# Altium PCB MCU052A_PCB.PcbDoc (part 1 of 2)
Units mil, origin at the board's own origin, x right, y up, seen from the top; angles counter-clockwise.
Board outline 2300 x 1400 mil, 4 copper layers (Top Layer, VCC Layer, GND Layer, Bottom Layer), stack 62.4 mil thick; 49 components, 52 nets, 135 pads, 118 vias.
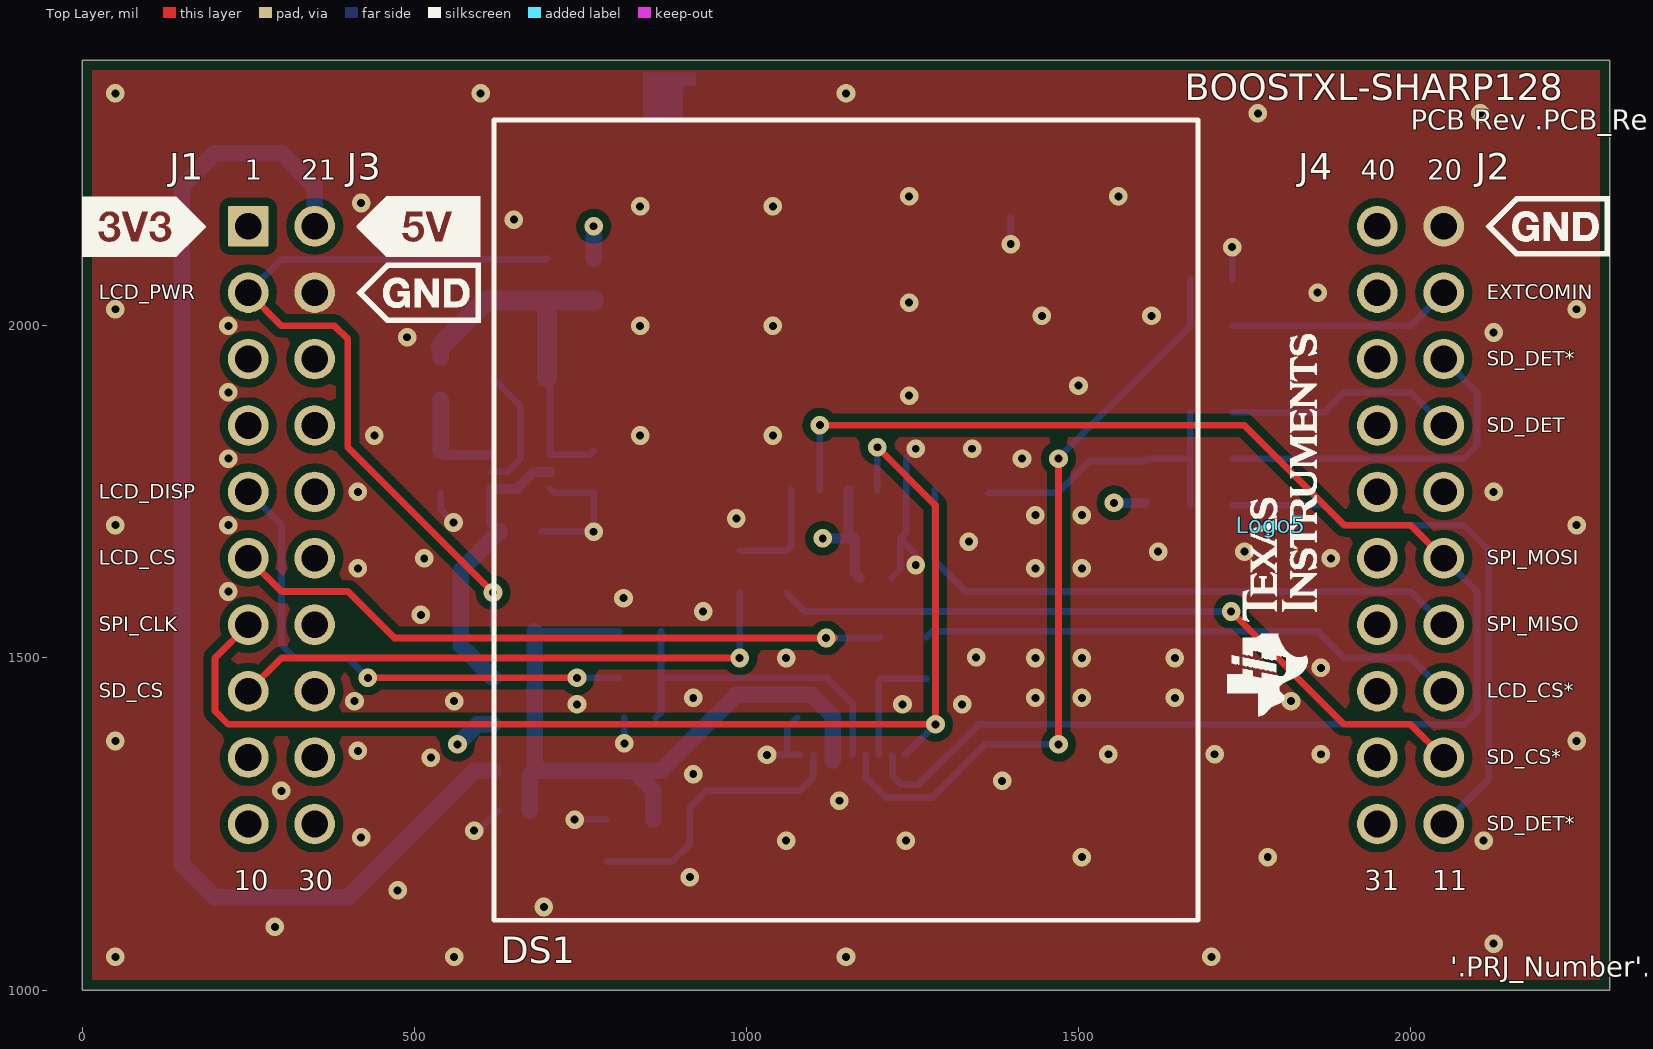
[diagram p0: Top Layer view]
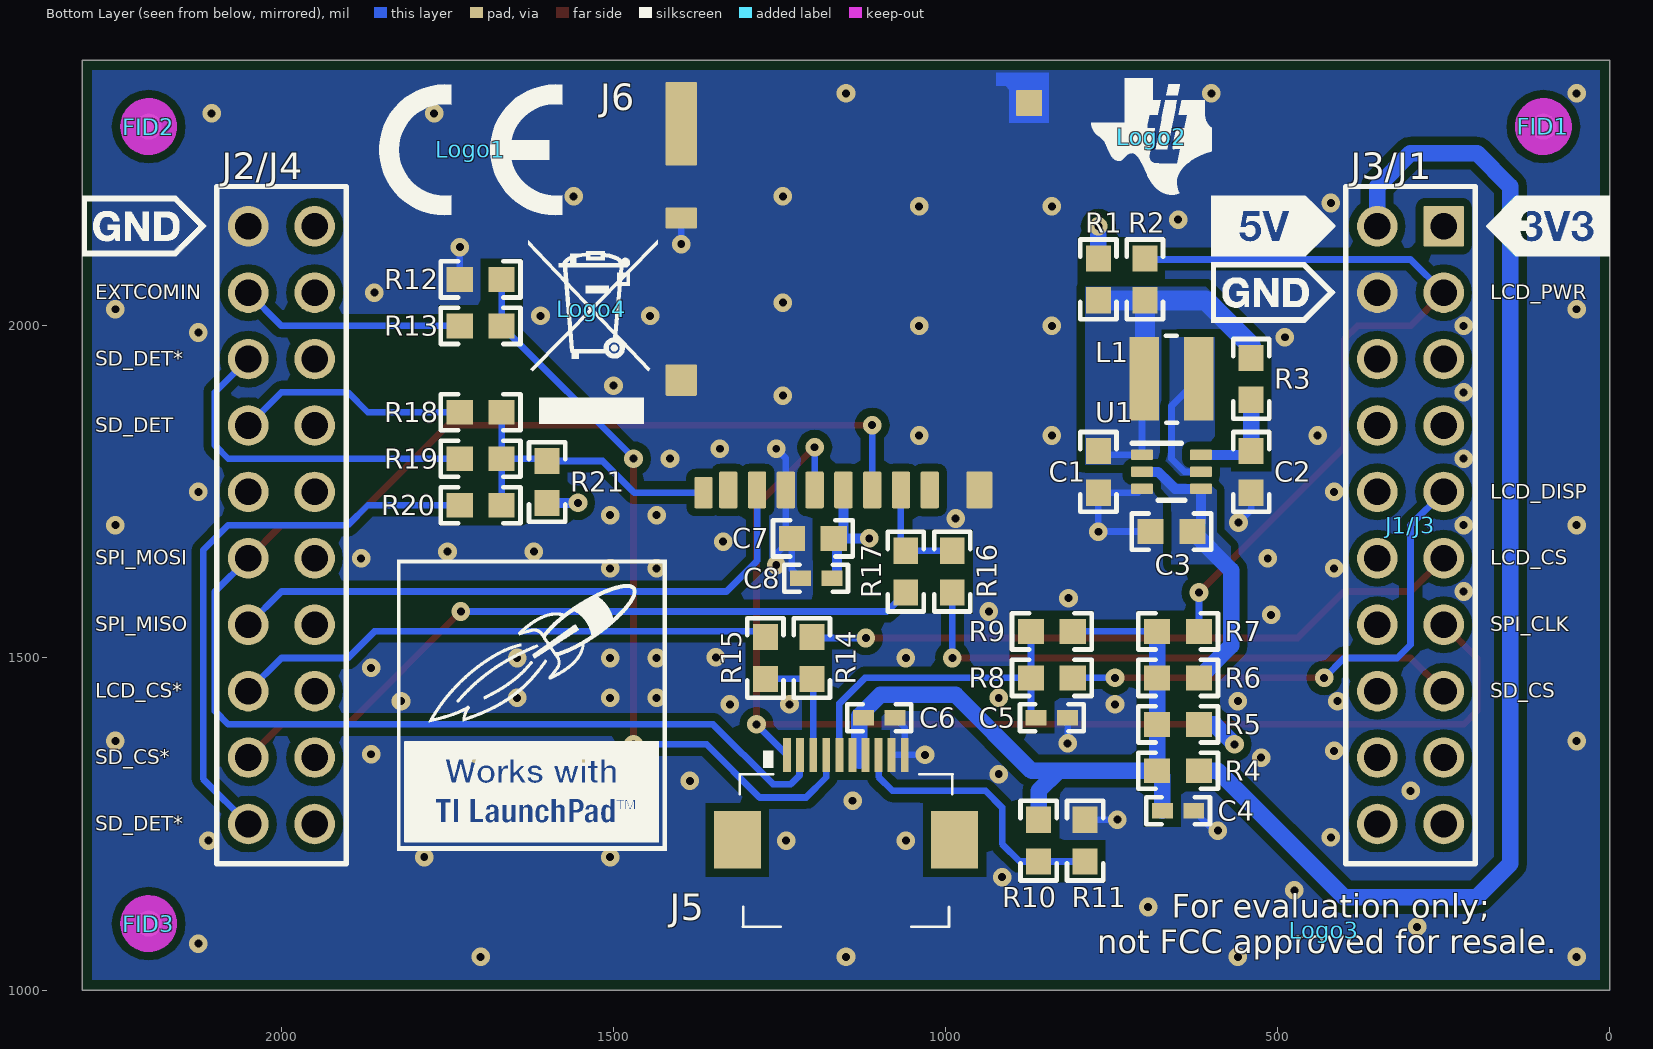
[diagram p1: Bottom Layer view, seen from below]
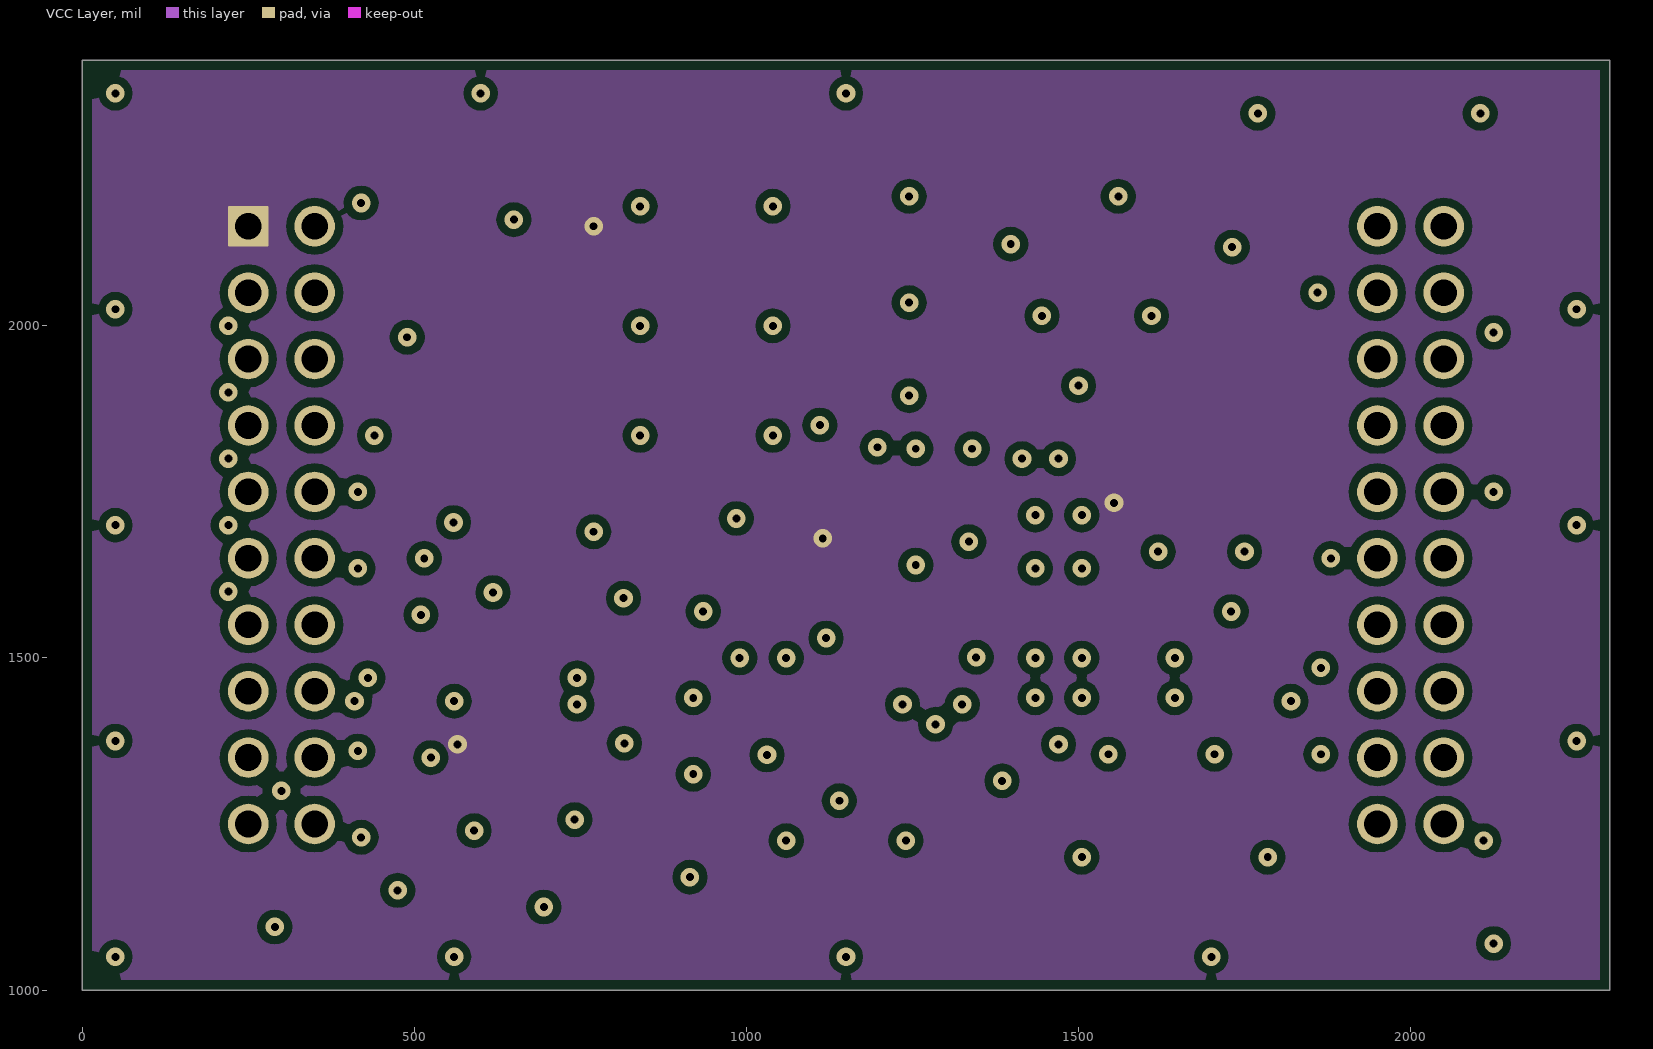
[diagram p2: VCC Layer]
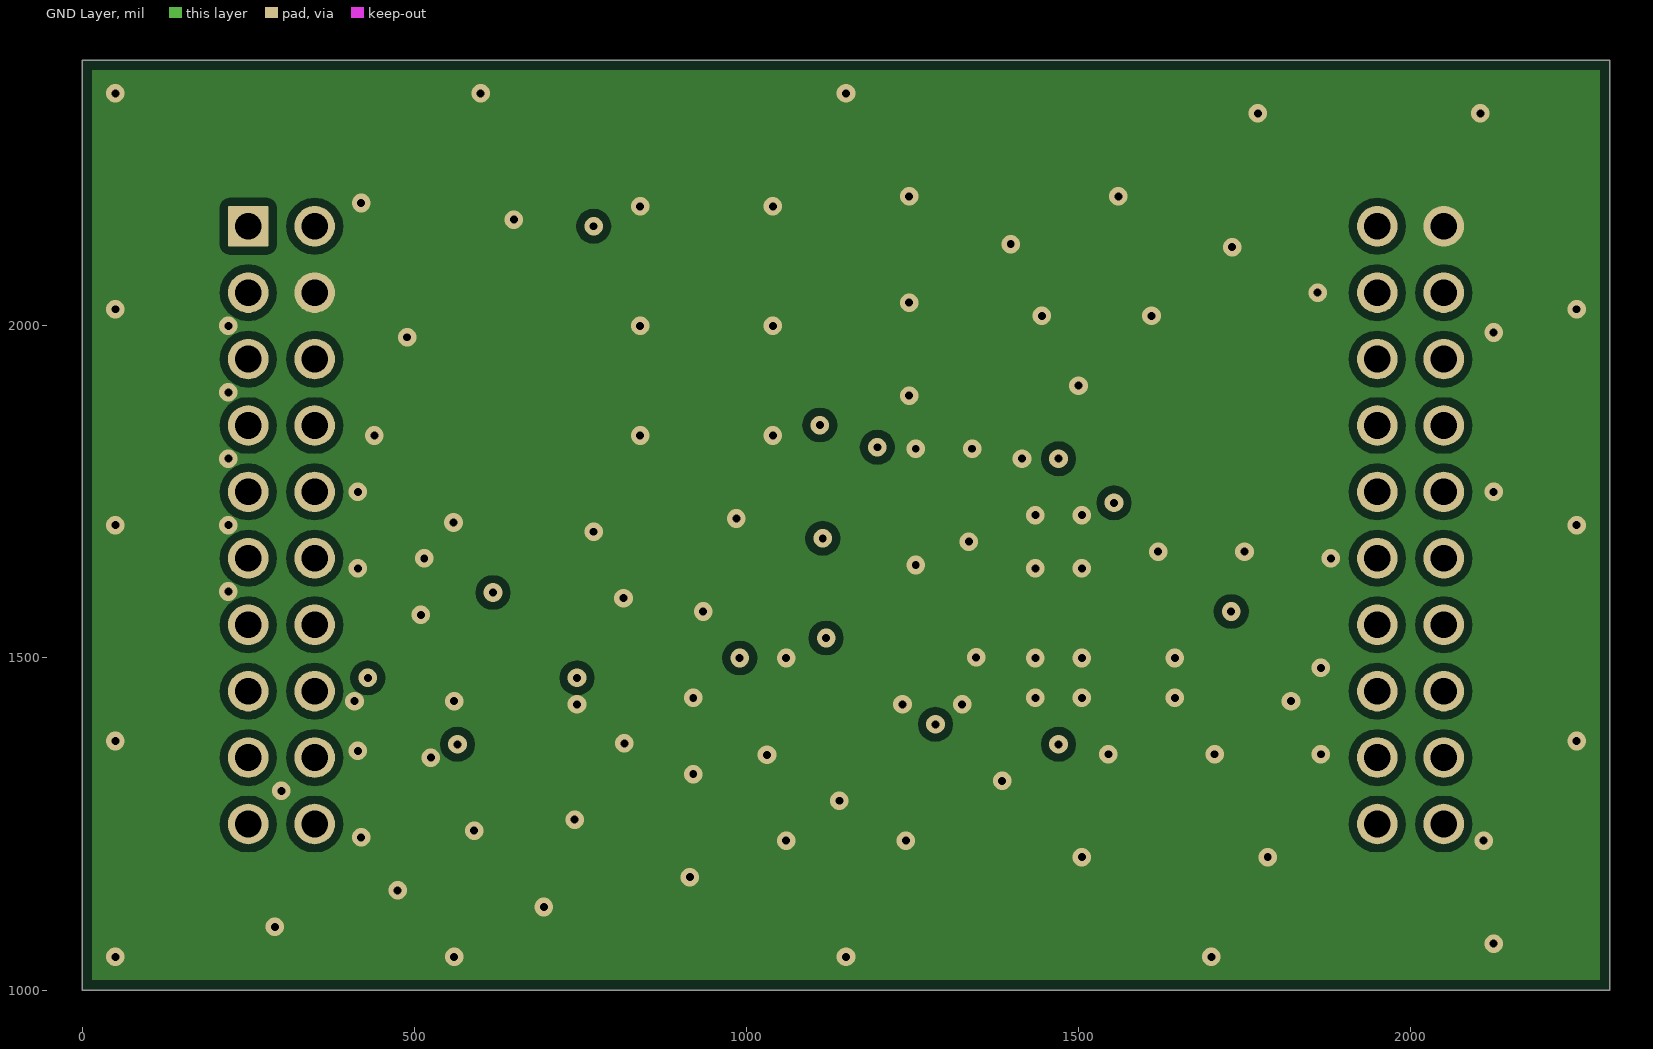
[diagram p3: GND Layer]

## Layer stack, top to bottom
Top Solder: solder mask 0.4, Solder Resist, Dk 3.5
Top Layer: signal copper 1.4
Dielectric 2: core 8.4, FR-4, Dk 4.2
VCC Layer: signal copper 1.4
Dielectric1: prepreg 40, FR-4, Dk 4.2
GND Layer: signal copper 1.4
Dielectric 3: core 8.4, FR-4, Dk 4.2
Bottom Layer: signal copper 1.4
Bottom Solder: solder mask 0.4, Solder Resist, Dk 3.5

## Board outline
0,1000 0,2400 2300,2400 2300,1000

## Design rules (kind name [scope] priority, off if disabled: settings)
AcuteAngle [All] p1: minimum=4.50000000000000E+0001 checktracksonly=FALSE
AssemblyTestPointUsage [All] p1: valid=2
BoardOutlineClearance BoardOutlineClearance_MountingHoles [OnCopper and InComponentClass('Mounting Holes')] p1: gap=40 ignorepadtopadclearanceinfootprint=FALSE
BoardOutlineClearance BoardOutlineClearance_Poly [OnCopper and IsPoly] p2: gap=15 ignorepadtopadclearanceinfootprint=FALSE
BoardOutlineClearance [OnCopper and Not InComponentClass('Logo') and not InComponentClass('FiducialMark') and not InRegion(1000,500,4000,800) and not InPoly] p3: gap=15 ignorepadtopadclearanceinfootprint=FALSE
Clearance Clearance_Keepouts [((IsTrack Or IsArc) And Not InPoly) And IsFree and IsKeepOut vs ((IsTrack Or IsArc) And Not InPoly) And IsFree and IsKeepOut] p1: gap=0 ignorepadtopadclearanceinfootprint=FALSE
Clearance Clearance_Poly [InPolygon] p2: gap=12 ignorepadtopadclearanceinfootprint=FALSE except(0: Arc-Hole Track-Hole SMDPad-Hole THPad-Hole Via-Hole Fill-Hole Poly-Hole Region-Hole Text-Hole)
Clearance Clearance_FiducialMark [IsKeepOut and InComponentClass('FiducialMark') vs IsPad and InComponentClass('FiducialMark')] p3: gap=0 ignorepadtopadclearanceinfootprint=FALSE
Clearance [All] p4: gap=7.87 ignorepadtopadclearanceinfootprint=FALSE except(0: Arc-Hole Track-Hole SMDPad-Hole THPad-Hole Via-Hole Fill-Hole Poly-Hole Region-Hole Text-Hole)
ComponentClearance ComponentClearance_MountingHoles_FiducialMarks [InComponentClass('Mounting Holes') vs InComponentClass('FiducialMark')] p1: gap=50 collisioncheckmode=3 verticalgap=10 showdistances=FALSE
ComponentClearance ComponentClearance_Shunt [InComponentClass('Header') vs InComponentClass('Shunt')] p2: gap=0 collisioncheckmode=3 verticalgap=0 showdistances=FALSE
ComponentClearance ComponentClearance_Logo [InComponentClass('Logo')] p3: gap=50 collisioncheckmode=3 verticalgap=10 showdistances=FALSE
ComponentClearance ComponentClearance_ScrewToNut [(HasFootprint('NY PMS 440 0025 PH')) vs (HasFootprint('Keystone_1902C'))] p4: gap=5 collisioncheckmode=3 verticalgap=10 showdistances=FALSE
ComponentClearance ComponentClearance_MountingHoles [InComponentClass('Mounting Holes')] p5: gap=250 collisioncheckmode=3 verticalgap=100000 showdistances=FALSE
ComponentClearance ComponentClearance_SmallPassives [HasFootprint('0201*') or HasFootprint('0402*') or HasFootprint('0508') or HasFootprint('0603*') or HasFootprint('0612') or HasFootprint('0805*') or HasFootprint('0815*') or HasFootprint('0830*') or HasFootprint('1206*') or HasFootprint('1210*') or HasFootprint('1808*') or HasFootprint('1812*') or HasFootprint('1825*') or HasFootprint('2010*') or HasFootprint('2220*') or HasFootprint('2225*') or HasFootprint('2512*') or HasFootprint('2728*') or HasFootprint('3518*') vs HasFootprint('0201*') or HasFootprint('0402*') or HasFootprint('0508') or HasFootprint('0603*') or HasFootprint('0612') or HasFootprint('0805*') or HasFootprint('0815*') or HasFootprint('0830*') or HasFootprint('1206*') or HasFootprint('1210*') or HasFootprint('1808*') or HasFootprint('1812*') or HasFootprint('1825*') or HasFootprint('2010*') or HasFootprint('2220*') or HasFootprint('2225*') or HasFootprint('2512*') or HasFootprint('2728*') or HasFootprint('3518*')] p6: gap=14.96 collisioncheckmode=3 verticalgap=10 showdistances=FALSE
ComponentClearance ComponentClearance_THtoSMT [IsThruComponent vs IsSMTComponent] p7: gap=40 collisioncheckmode=3 verticalgap=30 showdistances=FALSE
ComponentClearance ComponentClearance_THtoTH [IsThruComponent vs IsThruComponent] p8: gap=30 collisioncheckmode=3 verticalgap=30 showdistances=FALSE
ComponentClearance ComponentClearance_WEE_SDSlot_Clearance [InComponent('Logo4') vs InComponent('J6')] p9: gap=10 collisioncheckmode=3 verticalgap=10 showdistances=FALSE
ComponentClearance [All] p10: gap=30 collisioncheckmode=3 verticalgap=10 showdistances=FALSE
DiffPairsRouting [All] p1: maxlimit=100 minlimit=10 mostfreqgap=10 toplayer_minwidth=15 toplayer_maxwidth=15 toplayer_prefwidth=15 midlayer1_minwidth=15 midlayer1_maxwidth=15 midlayer1_prefwidth=15 midlayer2_minwidth=15 midlayer2_maxwidth=15 midlayer2_prefwidth=15 bottomlayer_minwidth=15 bottomlayer_maxwidth=15 bottomlayer_prefwidth=15 maxuncoupledlength=1000
FabricationTestPointUsage TestPointUsage [All] p1: valid=2 allowmultiple=FALSE
FabricationTestpoint Testpoint [All] p1: side=3 testpointundercomponent=TRUE minsize=40 maxsize=100 preferedsize=60 minholesize=0 maxholesize=40 preferedholesize=32 testpointgrid=1 allowsidetop=TRUE allowsidebottom=TRUE usegrid=TRUE gridtolerance=0.01
FanoutControl Fanout_LCC [IsLCC] p1: bgadir=Out bgaviamode=Centered fanoutstyle=Auto fanoutdirection=Alternating viagrid=1 // Fanout_LCC (Default Rule)
FanoutControl Fanout_BGA [IsBGA] p2: bgadir=Out bgaviamode=Centered fanoutstyle=Auto fanoutdirection=Alternating viagrid=1 // Fanout_BGA (Default Rule)
FanoutControl Fanout_Default [All] p4: bgadir=Out bgaviamode=Centered fanoutstyle=Auto fanoutdirection=Alternating viagrid=1 // Fanout_Default (Default Rule)
FanoutControl Fanout_Small [(CompPinCount < 5)] p5: bgadir=Out bgaviamode=Centered fanoutstyle=Auto fanoutdirection=OutThenIn viagrid=1 // Fanout_Small (Default Rule)
HoleSize [All] p1: absolutevalues=TRUE maxlimit=251 minlimit=7.87 maxpercent=80.000 minpercent=20.000
MinimumAnnularRing MinimumAnnularRing_ThermalPadVias [IsVia and InAnyComponent] p1: minimumring=5.91
MinimumAnnularRing [All] p2: minimumring=8
MinimumSolderMaskSliver MinimumSolderMaskSliver_Logo [InComponentClass('Logo') vs InComponentClass('Logo')] p1: minsoldermaskwidth=0.7
MinimumSolderMaskSliver [All] p2: minsoldermaskwidth=3.94
PlaneConnect [All] p1: planeconnectstyle=Relief reliefexpansion=10 reliefentries=4 reliefconductorwidth=10 reliefairgap=10
PolygonConnect [All] p1: connectstyle=Direct reliefconductorwidth=10 reliefentries=4 polygonreliefangle="90 Angle" airgapwidth=10
RoutingVias ThermalPadVias [IsVia and InAnyComponent] p1: holewidth=7.87 width=19.68 viastyle="Through Hole" minholewidth=7.87 minwidth=19.68 maxholewidth=12.99 maxwidth=23.62
RoutingVias [All] p2: holewidth=16 width=34 viastyle="Through Hole" minholewidth=7.87 minwidth=26 maxholewidth=40 maxwidth=65
SilkToBoardRegionClearance [Not ((IsComment or IsDesignator) And (Hide <> 'False')) and not InRegion(1000,500,4000,800)] p1:
SilkToSilkClearance SilkToSilkClearance_Pb-FreeLogo [(HasFootprint('Pb-Free_Overlay_Medium') OR HasFootprint('Pb-Free_Overlay_Small')) vs (HasFootprint('Pb-Free_Overlay_Medium') OR HasFootprint('Pb-Free_Overlay_Small'))] p1: silktosilkclearance=0
SilkToSilkClearance [All] p2: silktosilkclearance=3
SilkToSolderMaskClearance SilkToComponentPadClearance [(IsPad or IsFill or IsRegion) and InAnycomponent] p1: minsilkscreentomaskgap=5 clearancetoexposedcopper=TRUE
SilkToSolderMaskClearance "Silk to Solder Mask Opening" [All] p2: minsilkscreentomaskgap=4 clearancetoexposedcopper=FALSE
SolderMaskExpansion SolderMaskExpansion_via [isvia] p1: expansion=-17
SolderMaskExpansion [All] p2: expansion=1.97
Width [All] p1: maxlimit=100 minlimit=6 preferedwidth=10 checkconnectedcopper=TRUE
15 further rules are at their usual default settings.

## Classes and differential pairs
component class MCU052A_BOOSTXL-SHARP128: C1 C2 C3 C4 C5 C6 C7 C8 J1/J3 J2/J4 J5 J6 L1 R1 R2 R3 R4 R5 R6 R7 R8 R9 R10 R11 R12 R13 R14 R15 R16 R17 R18 R19 R20 R21 U1
component class AssemblyNote: ZZ2 ZZ3 ZZ4 ZZ5 ZZ6
component class FiducialMark: FID1 FID2 FID3
component class MCU052A_EVM_Hardware: DS1 FID1 FID2 FID3 Logo1 Logo2 Logo3 Logo4 Logo5 Logo? ZZ2 ZZ3 ZZ4 ZZ5 ZZ6
component class Logo: Logo2 Logo5

## Components (designator, comment, footprint, x,y, rotation, side; value= is the part's Value field where it differs from the comment)
C1 "GRM188R61A226ME15D" 0603 770,1780.31 r270 bottom value=22uF
C2 "GRM188R71E103KA01D" 0603 540,1780.31 r270 bottom value=0.01uF
C3 "GRM188C71A475KE11D" 0603 660,1690.31 r0 bottom value=4.7uF
C4 "GRM155R71A104KA01D" 0402 650,1270 r180 bottom value=0.1uF
C5 "GRM155R71A104KA01D" 0402 840,1410 r180 bottom value=0.1uF
C6 "GRM155R71A104KA01D" 0402 1100,1410 r180 bottom value=0.1uF
C7 "GRM188R71C105KA12D" 0603 1200,1680 r0 bottom value=1uF
C8 "GRM155R71A104KA01D" 0402 1195,1620 r0 bottom value=0.1uF
DS1 "LS013B7DH03" Sharp_LS013B7DH03 1150,1740 r0 top
FID1 "Fiducial" Fiducial10-20 100,2300 r180 bottom
FID2 "Fiducial" Fiducial10-20 2200,2300 r180 bottom
FID3 "Fiducial" Fiducial10-20 2200,1100 r180 bottom
J1/J3 "SSQ-110-03-T-D" BoosterPack_40pin_J1J3 300,1700 r180 bottom
J2/J4 "SSQ-110-03-T-D" BoosterPack_40pin_J2J4 2000,1700 r180 bottom
J5 "FH12-10S-0.5SH[55]" Hirose_FH12-10S-0_5SH[55] 1150,1290 r180 bottom
J6 "DM3BT-DSF-PEJS" Hirose_DM3BT-DSF-PEJS 1150,2060 r0 bottom
L1 "EPL3015-472MLB" EPL3015 660,1920.31 r180 bottom value=4.7uH
Logo1 "CE Mark" CE_Mark_5mm 1715,2265 r180 bottom
Logo2 "Texas Instruments" TI_Symbol_Overlay_Small 690,2285 r180 bottom
Logo3 "FCC disclaimer" FCC_disclaimer_stacked 430,1090 r180 bottom
Logo4 "WEEE logo" WEEE_Minimum 1533,2025 r180 bottom
Logo5 "Texas Instruments" TI_Stacked_Overlay_Small_Vertical 1790,1700 r0 top
R1 "CRCW06030000Z0EA" 0603 770,2070 r270 bottom value=0
R2 "CRCW06030000Z0EA" 0603 700,2070 r270 bottom value=0
R3 "CRCW0603133KFKEA" 0603 540,1920.31 r270 bottom value=133k
R4 "CRCW06030000Z0EA" 0603 650,1330.08 r180 bottom value=0
R5 "CRCW06030000Z0EA" 0603 650,1400 r180 bottom value=0
R6 "CRCW06030000Z0EA" 0603 650,1470 r180 bottom value=0
R7 "CRCW06030000Z0EA" 0603 650,1540 r180 bottom value=0
R8 "CRCW06030000Z0EA" 0603 840,1470 r180 bottom value=0
R9 "CRCW06030000Z0EA" 0603 840,1540 r180 bottom value=0
R10 "CRCW06034K70JNEA" 0603 860,1225 r90 bottom value=4.7k
R11 "CRCW06030000Z0EA" 0603 790,1225 r270 bottom value=0
R12 "CRCW06030000Z0EA" 0603 1700,2070 r0 bottom value=0
R13 "CRCW06030000Z0EA" 0603 1700,2000 r0 bottom value=0
R14 "CRCW06030000Z0EA" 0603 1201.32,1500 r90 bottom value=0
R15 "CRCW06030000Z0EA" 0603 1271.32,1500 r90 bottom value=0
R16 "CRCW06030000Z0EA" 0603 990,1630 r270 bottom value=0
R17 "CRCW06030000Z0EA" 0603 1060,1630 r270 bottom value=0
R18 "CRCW06030000Z0EA" 0603 1700,1870 r0 bottom value=0
R19 "CRCW06030000Z0EA" 0603 1700,1800 r0 bottom value=0
R20 "CRCW06030000Z0EA" 0603 1700,1730 r0 bottom value=0
R21 "CRCW0603100KFKEA" 0603 1600,1765 r270 bottom value=100k
U1 "TPS61222DCKR" DCK0006A_N 660,1780.31 r180 bottom
ZZ2 "These assemblies are ESD sensitive, ESD precautions shall be observed." AssemblyNote 185,3930 r0 top
ZZ3 "These assemblies must be clean and free from flux and all contaminants. Use of no clean flux is not acceptable." AssemblyNote 185,3790 r0 top
ZZ4 "These assemblies must comply with workmanship standards IPC-A-610 Class 2, unless otherwise specified." AssemblyNote 185,3650 r0 top
ZZ5 "Mount LCD (DS1) to the top-side of PCB using a double-sided sticky foam/pad." AssemblyNote 185,3510 r0 top
ZZ6 "Bend/Fold the LCD's Flexible Flat Cable around the bottom edge to the reverse side of the PCB and connect securely to J5. Lift the securing tab on J5 vertically, insert the LCD flex cable, and push the securing tab down until a tactile click." AssemblyNote 185,3365 r0 top

## Footprints (in the part's own frame and the unit in brackets; to place one, negate y for a bottom-side part, rotate by r counter-clockwise, add the part's x,y. Pads: shape width x height; smd on the part's side, far side on the other; paste and mask are expansions set on the pad)
0402 [mm] "0402 from SM-752 data"
  rect 0.8x0.6 smd: 1(-0.6,0) 2(0.6,0)
  silkscreen extent -1.22,-0.52 1.22,0.52, body extent -0.55,-0.3 0.55,0.3, height 0.6
0603 [mm] "0603 from SM-752 data"
  rect 1x0.95 smd: 1(-0.8,0) 2(0.8,0)
  silkscreen extent -1.52,-0.69 1.52,0.69, body extent -0.87,-0.47 0.87,0.47, height 1
AssemblyNote [mil] "Assembly Note"
BoosterPack_40pin_J1J3 [mm] "Receptacle, 2.54mm, 10x2, TH"
  rrect6% 1.55x1.55 hole 1.02: 1(1.27,11.43)
  round 1.55 hole 1.02: 2(1.27,8.89) 3(1.27,6.35) 4(1.27,3.81) 5(1.27,1.27) 6(1.27,-1.27) 7(1.27,-3.81) 8(1.27,-6.35) 9(1.27,-8.89) 10(1.27,-11.43) 21(-1.27,11.43) 22(-1.27,8.89) 23(-1.27,6.35) 24(-1.27,3.81) 25(-1.27,1.27) 26(-1.27,-1.27) 27(-1.27,-3.81) 28(-1.27,-6.35) 29(-1.27,-8.89) 30(-1.27,-11.43)
  silkscreen extent -7.62,-12.95 7.62,12.95, body extent -2.48,-12.95 2.48,12.95, height 8.51
BoosterPack_40pin_J2J4 [mm] "Receptacle, 2.54mm, 10x2, TH"
  round 1.55 hole 1.02: 11(-1.27,-11.43) 12(-1.27,-8.89) 13(-1.27,-6.35) 14(-1.27,-3.81) 15(-1.27,-1.27) 16(-1.27,1.27) 17(-1.27,3.81) 18(-1.27,6.35) 19(-1.27,8.89) 20(-1.27,11.43) 31(1.27,-11.43) 32(1.27,-8.89) 33(1.27,-6.35) 34(1.27,-3.81) 35(1.27,-1.27) 36(1.27,1.27) 37(1.27,3.81) 38(1.27,6.35) 39(1.27,8.89) 40(1.27,11.43)
  silkscreen extent -7.62,-12.95 2.48,12.95, body extent -2.48,-12.95 2.48,12.95, height 8.51
CE_Mark_5mm [mil] "Minimum text height for CE Mark"
  silkscreen extent -138,-98 138,98
DCK0006A_N [mm] "SOT23, 6-Leads, Body 2x1.3mm, Pitch 0.65mm, Lead Span 2.1mm, IPC Medium Density"
  rrect25% 0.85x0.4 smd: 1(-1.125,0.65) 2(-1.125,0) 3(-1.125,-0.65) 4(1.125,-0.65) 5(1.125,0) 6(1.125,0.65)
  silkscreen extent -1.5,-1.09 0.51,1.09, body extent -1.14,-1 1.14,1, height 0.95
EPL3015 [mm] "COILCRAFT"
  rect 1.12x3.2 smd: 1(-1.04,0) 2(1.04,0)
  silkscreen extent -0.22,-1.68 0.23,1.65, body extent -1.6,-1.6 1.6,1.6, height 1.55
FCC_disclaimer_stacked [mil]
Fiducial10-20 [mm]
  round 1 smd mask+0.5: 1(0,0)
  Top Layer keep-out circle w1.178: c0,0 r0.5
Hirose_DM3BT-DSF-PEJS [mm] "Conncetor, micro SD, 8+2 Pos, R/A, SMT"
  rrect14% 0.7x1.4 smd: 1(-3.2,7.8) 2(-2.1,7.8) 3(-1,7.8) 4(0.1,7.8) 5(1.2,7.8) 6(2.3,7.8) 7(3.4,7.8) 8(4.5,7.8)
  rrect8% 1.2x0.8 smd: 9(6.3,-2.6)
  rrect14% 0.7x1.2 smd: 10(5.45,7.9)
  rrect10% 1x1.4 smd: S1(-5.1,7.8)
  rrect8% 1.2x1.2 smd: S2(6.3,3.6)
  rrect8% 1.2x3.2 smd: S3(6.3,-6.2)
  rrect8% 1x1 smd: S4(-7,-7)
  Top Layer region: -7.75,-8.15 -5.75,-8.15 -5.75,-7.65 -6.1,-7.65 -6.25,-7.5 -6.25,-6.25 -7.75,-6.25
  body extent -6.92,-7.98 6.92,7.97, height 2.38
Hirose_FH12-10S-0_5SH[55] [mm] "Hirose, footprint recommended"
  rect 0.3x1.3 smd: 1(-2.254,1.626) 2(-1.754,1.626) 3(-1.254,1.626) 4(-0.754,1.626) 5(-0.253,1.626) 6(0.246,1.626) 7(0.746,1.626) 8(1.246,1.626) 9(1.746,1.626) 10(2.247,1.626)
  rect 1.8x2.2 smd: M1(-4.153,-1.622) M2(4.153,-1.626)
  silkscreen extent -4.06,-4.95 4.07,1.78, body extent -4.55,-4.88 4.56,0.84, height 2
Sharp_LS013B7DH03 [mil] "LCD Display Dot Pixels 128x128"
  body extent -524,-1167 524,563, height 29
TI_Stacked_Overlay_Small_Vertical [mil]
  silkscreen extent -66,-288 69,288
TI_Symbol_Overlay_Small [mil]
  silkscreen extent -90,-88 91,88
WEEE_Minimum [mil] "WEEElie bin"
  silkscreen extent -95,-172 99,104

## Part data
C1: library part CMP-0007324-5, "CAP, CERM, 22 uF, 10 V, +/- 20%, X5R, 0603", Cap_Case=0603, Manufacturer=MuRata, Supplier Part Number 1=490-10476-1-ND, TempCo=X5R, Tolerance_%=20%, Value1=Unknown, Value2=10V, ValueDisplayed=22uF, AEC Category=Q200, AEC Qualified=?, Cap_F=22µF, ComponentLink1Description="Datasheet link", ComponentLink1URL=http://psearch.murata.com/capacitor/product/GRM188R61A226ME15%23.pdf, CompType=Capacitor, LatestRevisionDate=2017-03-09, MountType=SMT, PackageReference=0603, PartNumber=GRM188R61A226ME15D, Polarized=N, Published=2008-06-19, Publisher="Texas Instruments", RoHS=Y, SizeArea_mm2=1.28, SizeAreaWB_mm2=4.68, SizeX_mm=1.6, SizeY_mm=0.8, SizeZ_mm=1, Supplier 1=Digi-Key, Supplier 2=Newark, Supplier 3=Mouser, Supplier Part Number 2=68X2786, Supplier Part Number 3=81-GRM188R61A226ME5D, TaMax_C=85°C, TaMin_C=-55°C, Technology=Ceramic, U/M=EA, VDC_V=10V
C2: library part CMP-0007403-4, "CAP, CERM, 0.01 uF, 25 V, +/- 10%, X7R, 0603", Cap_Case=0603, Manufacturer=MuRata, Supplier Part Number 1=490-1520-1-ND, TempCo=X7R, Tolerance_%=10%, Value1=Unknown, Value2=25V, ValueDisplayed=0.01uF, AEC Category=Q200, AEC Qualified=?, Cap_F=10nF, ComponentLink1Description="Datasheet link", ComponentLink1URL=http://search.murata.co.jp/Ceramy/PnsearchViewAction.do?HnOFG=ON&HnNFG=ON&SEL_CNT=50&sLang=en&sKey=GRM188R71E103KA01D&x=9&y=9&search=startwith, CompType=Capacitor, LatestRevisionDate=2017-03-09, MountType=SMT, PackageReference=0603, PartNumber=GRM188R71E103KA01D, Polarized=N, Published=2008-06-19, Publisher="Texas Instruments", RoHS=Y, SizeArea_mm2=1.28, SizeAreaWB_mm2=4.68, SizeX_mm=1.6, SizeY_mm=0.8, SizeZ_mm=1, Supplier 1=Digi-Key, Supplier 2=Mouser, Supplier Part Number 2=81-GRM39X103K25, TaMax_C=125°C, TaMin_C=-55°C, Technology=Ceramic, U/M=EA
C3: library part CMP-0007291-4, "CAP, CERM, 4.7 uF, 10 V, +/- 10%, X7S, 0603", Cap_Case=0603, Manufacturer=MuRata, Supplier Part Number 1=490-11992-1-ND, TempCo=X7S, Tolerance_%=10%, Value1=Unknown, Value2=10V, ValueDisplayed=4.7uF, AEC Category=Q200, AEC Grade=N/A, AEC Qualified=N, Cap_F=4.7µF, ComponentLink1Description="Datasheet link", ComponentLink1URL=http://search.murata.co.jp/Ceramy/image/img/A01X/G101/ENG/GRM188C71A475KE11-01.pdf, CompType=Capacitor, LatestRevisionDate=2017-03-09, MountType=SMT, PackageReference=0603, PartNumber=GRM188C71A475KE11D, Polarized=N, Published=2008-06-19, Publisher="Texas Instruments", RoHS=Y, SizeArea_mm2=1.28, SizeAreaWB_mm2=4.68, SizeX_mm=1.6, SizeY_mm=0.8, SizeZ_mm=1, Supplier 1=Digi-Key, Supplier 2=Mouser, Supplier Part Number 2=81-GRM188C71A475KE1D, TaMax_C=125°C, TaMin_C=-55°C, Technology=Ceramic, U/M=EA, VDC_V=10V
C4 C5 C6 C8: library part CMP-0006629-2, "CAP, CERM, 0.1 uF, 10 V, +/- 10%, X7R, 0402", Cap_Case=0402, Manufacturer=MuRata, Supplier Part Number 1=GRM155R71A104KA01D-ND, TempCo=X7R, Tolerance_%=10%, Value1=Unknown, Value2=10V, ValueDisplayed=0.1uF, AEC Category=Q200, AEC Qualified=?, Cap_F=100nF, ComponentLink1Description="Datasheet link", ComponentLink1URL=http://search.murata.co.jp/Ceramy/PnsearchViewAction.do?HnOFG=ON&HnNFG=ON&SEL_CNT=50&sLang=en&sKey=GRM155R71A104KA01D&x=9&y=9&search=startwith, CompType=Capacitor, LatestRevisionDate=2017-03-09, MountType=SMT, PackageReference=0402, PartNumber=GRM155R71A104KA01D, Polarized=N, Published=2008-06-19, Publisher="Texas Instruments", RoHS=Y, SizeArea_mm2=0.5, SizeAreaWB_mm2=3, SizeX_mm=1, SizeY_mm=0.5, SizeZ_mm=0.6, Supplier 1=Digi-Key, Supplier 2=Newark, Supplier 3=Mouser, Supplier Part Number 2=14T3278, Supplier Part Number 3=81-GRM155R71A104KA1D, TaMax_C=125°C, TaMin_C=-55°C, Technology=Ceramic, U/M=EA
C7: library part CMP-0007379-4, "CAP, CERM, 1 uF, 16 V, +/- 10%, X7R, 0603", Cap_Case=0603, Manufacturer=MuRata, Supplier Part Number 1=490-3900-1-ND, TempCo=X7R, Tolerance_%=10%, Value1="0.011 ohm", Value2=16V, ValueDisplayed=1uF, AEC Category=Q200, AEC Qualified=?, Cap_F=1µF, ComponentLink1Description="Datasheet link", ComponentLink1URL=http://search.murata.co.jp/Ceramy/PnsearchViewAction.do?HnOFG=ON&HnNFG=ON&SEL_CNT=50&sLang=en&sKey=GRM188R71C105KA12D&x=9&y=9&search=startwith, CompType=Capacitor, ESR_ohm=0.011, LatestRevisionDate=2017-03-09, MountType=SMT, PackageReference=0603, PartNumber=GRM188R71C105KA12D, Polarized=N, Published=2008-06-19, Publisher="Texas Instruments", RoHS=Y, SizeArea_mm2=1.28, SizeAreaWB_mm2=4.68, SizeX_mm=1.6, SizeY_mm=0.8, SizeZ_mm=1, Supplier 1=Digi-Key, Supplier 2=Mouser, Supplier 3=Farnell, Supplier Part Number 2=81-GRM188R71C105KA12, Supplier Part Number 3=1828826, TaMax_C=125°C, TaMin_C=-55°C, Technology=Ceramic, U/M=EA, VDC_V=16V
DS1: library part CMP-0067626-1, "LCD Display Dot Pixels 128x128", Manufacturer="Sharp Microelectronics", Supplier Part Number 1=425-2903-ND, ComponentLink1Description="Datasheet Link", ComponentLink1URL=https://sps06.itg.ti.com/sites/KMS/crossdivteams/altium/docs/ComponentDatasheets/LS013B7DH03_Spec.pdf, CompType="LCD Module", Key=LS013B7DH03, LatestRevisionDate=2017-06-05, MountType=N/A, PackageReference="LCD Display Dot Pixels 128x128", PartNumber=LS013B7DH03, Publisher="Texas Instruments", RoHS=Y, Supplier 1=Digi-Key, Supplier 2=Mouser, Supplier Part Number 2=852-LS013B7DH03
FID1 FID2 FID3: library part CMP-0077181-1, "Fiducial mark.  There is nothing to buy or mount.", Manufacturer=N/A, ClassName=FiducialMark, CompType=Fiducial, MountType=N/A, PackageReference=N/A, PartNumber=N/A
J1/J3: library part CMP-0003837-2, "Receptacle, 2.54mm, 10x2, Tin, TH", Alternate Manufacturer="Major League Electronics", Alternate PartNumber=CRD-081413-A-G, Manufacturer=Samtec, Supplier Part Number 1=SAM1204-10-ND, ComponentLink1Description="Datasheet Link", ComponentLink1URL=https://www.samtec.com/ftppub/cpdf/SSQ-1XX-XX-XXX-X-XX-XXX-XX-X-MKT.pdf, CompType=Receptacle, Green_EU RoHS=Passed, Green_EU RoHS-2=Passed, Green_Lifecycle=Active, Green_REACh=Incomplete, MountType=TH, Note="Booster Pack 40 pin J1 and J3", PackageReference="10x2 Receptacle", PartNumber=SSQ-110-03-T-D, RoHS=Y, Supplier 1=Digi-Key, Supplier 2=Newark, Supplier Part Number 2=11P8392
J2/J4: library part CMP-0078266-2, "Receptacle, 2.54mm, 10x2, Tin, TH", Alternate Manufacturer="Major League Electronics", Alternate PartNumber=CRD-081413-A-G, Manufacturer=Samtec, Supplier Part Number 1=SAM1204-10-ND, ComponentLink1Description="Datasheet Link", ComponentLink1URL=https://www.samtec.com/ftppub/cpdf/SSQ-1XX-XX-XXX-X-XX-XXX-XX-X-MKT.pdf, CompType=Receptacle, Green_EU RoHS=Passed, Green_EU RoHS-2=Passed, Green_Lifecycle=Active, Green_REACh=Incomplete, MountType=TH, Note="Booster Pack 40 pin J2 and J4", PackageReference="10x2 Receptacle", PartNumber=SSQ-110-03-T-D, RoHS=Y, Supplier 1=Digi-Key, Supplier 2=Newark, Supplier Part Number 2=11P8392
J5: library part CMP-0075009-2, "Connector, FPC 10 Pos. 9.1x2.0x5.6 mm", Manufacturer="Hirose Electric Co. Ltd.", PartNumber=FH12-10S-0.5SH(55), Supplier Part Number 1=HFJ110CT-ND, CNHeader=False, ComponentLink1Description="Datasheet URL", ComponentLink1URL=http://www.hirose.co.jp/cataloge_hp/e58605370.pdf, CompType="FFC or FPC", CT=True, LatestRevisionDate=2017-07-12, MountType=SMT, PackageReference="Connector PFC, 9.1x2.0x5.6mm", Publisher="Texas Instruments", RoHS=Y, Supplier 1=Digi-Key, Supplier 2=Mouser, Supplier Part Number 2=798-FH12-10S-0.5SH55
J6: library part CMP-0080007-1, "Conncetor, micro SD, 8+2 Pos, R/A, SMT", Manufacturer="Hirose Electric Co. Ltd.", Supplier Part Number 1=HR1942CT-ND, ComponentLink1Description="Datasheet URL", ComponentLink1URL=https://www.hirose.com/product/en/download_file/key_name/DM3/category/Catalog/doc_file_id/49662/?file_category_id=4&item_id=195&is_series=1, CompType=Connector, ContactFinish=Gold, Gender=Female, MountType=SMT, Orientation=R/A, PackageReference="Conncetor, micro SD, 8+2 Pos, R/A, SMT", PartNumber=DM3BT-DSF-PEJS, PinCount=10, Pitch_mm=1.1, RoHS=Y, Row_Count=1, Supplier 1=Digi-Key, Supplier 2=Newark, Supplier 3=Mouser, Supplier Part Number 2=35R0580, Supplier Part Number 3=798-DM3BT-DSF-PEJS
L1: library part CMP-0060351-1, "Inductor, Shielded, Ferrite, 4.7 uH, 1.2 A, 0.14 ohm, SMD", Manufacturer=Coilcraft, Supplier Part Number 1=994-EPL3015-472MLB, Value1="0.14 ohm", Value2=1.2A, ValueDisplayed=4.7uH, AEC Category=Q200, AEC Qualified=?, ComponentLink1Description="Datasheet link", ComponentLink1URL=http://www.coilcraft.com/pdfs/epl3015.pdf, CompType=Inductor, DCR_ohm=1.4d, Green_EU RoHS=Incomplete, Green_EU RoHS-2=Incomplete, Green_Lifecycle="Not Set", Green_REACh=Incomplete, Imax_A=1.2A, Ind_H=4.7µH, Irms="1.4A @ 40C rise", Isat="1.2A @ 30% inductance drop", LatestRevisionDate=2017-06-02, Material=Ferrite, MountType=SMT, PackageReference="Inductor, 3x1.55x3mm", PartNumber=EPL3015-472MLB, Published=2008-06-26, Publisher="Texas Instruments", RoHS=Y, SizeArea_mm2=9, SizeAreaWB_mm2=16, SizeX_mm=3, SizeY_mm=3, SizeZ_mm=1.55, Supplier 1=Mouser, Supplier 2=Farnell, Supplier Part Number 2=2287412, Technology=Shielded
Logo1: library part CMP-0074844-1, LatestRevisionDate=2017-07-06, Lib Reference="CE Mark", PartNumber="CE Mark", Published=2009-03-03, Publisher="Texas Instruments", SymbolCreator=a0412235
Logo2 Logo5: library part CMP-0074838-1, "Texas Instrument Corporate Signature", ClassName=Logo, LatestRevisionDate=2017-07-06, Lib Reference=TI_Logo, PartNumber="Texas Instruments", Published=2009-03-03, Publisher="Texas Instruments", SymbolCreator=a0412235, SymbolVersion=2011-08-22
Logo3: library part CMP-0074847-1, "FCC_disclaimer", LatestRevisionDate=2017-07-06, Lib Reference=FCC_disclaimer, PartNumber="FCC disclaimer", Published=2009-03-03, Publisher="Texas Instruments"
Logo4: library part CMP-0074769-1, Lib Reference="WEEE logo", PartNumber="WEEE logo"
R1 R2 R4 R5 R6 R7 R8 R9 R11 R12 R13 R14 R15 R16 R17 R18 R19 R20: library part CMP-0025697-4, "RES, 0, 5%, 0.1 W, AEC-Q200 Grade 0, 0603", Manufacturer=Vishay-Dale, Power_W=100mW, Supplier Part Number 1=541-0.0GCT-ND, TempCo="200 ppm/C", Tolerance_%=5%, Value2=0.1W, Value_Code=0000, ValueDisplayed=0, AEC Category=Q200, AEC Grade=0, AEC Qualified=Y, ComponentLink1Description="Datasheet link", ComponentLink1URL=http://www.vishay.com/docs/20035/dcrcwe3.pdf, CompType=Resistor, EIA_Code=E24, MountType=SMT, PackageReference=0603, PartNumber=CRCW06030000Z0EA, Res_ohm=0, RoHS=E, SizeArea_mm2=1.28, SizeX_mm=1.6, SizeY_mm=0.8, SizeZ_mm=1, Supplier 1=Digi-Key, Supplier 2=Newark, Supplier 3=Mouser, Supplier Part Number 2=52K8014, Supplier Part Number 3=71-CRCW0603-0-E3, Technology="Thick Film", Value1=5%, VDC_V=75V
R3: library part CMP-0022038-4, "RES, 133 k, 1%, 0.1 W, AEC-Q200 Grade 0, 0603", Manufacturer=Vishay-Dale, Power_W=100mW, Supplier Part Number 1=541-133KHCT-ND, TempCo="100 ppm/C", Tolerance_%=1%, Value2=0.1W, Value_Code=133k, AEC Category=Q200, AEC Grade=0, AEC Qualified=Y, ComponentLink1Description="Datasheet link", ComponentLink1URL=http://www.vishay.com/docs/20035/dcrcwe3.pdf, CompType=Resistor, EIA_Code=E96, MountType=SMT, PackageReference=0603, PartNumber=CRCW0603133KFKEA, Res_ohm=133k, RoHS=E, SizeArea_mm2=1.28, SizeX_mm=1.6, SizeY_mm=0.8, SizeZ_mm=1, Supplier 1=Digi-Key, Supplier 2=Newark, Supplier 3=Mouser, Supplier Part Number 2=52K8129, Supplier Part Number 3=71-CRCW0603-133K-E3, Technology="Thick Film", Value1=1%, ValueDisplayed=133k, VDC_V=75V
R10: library part CMP-0025817-4, "RES, 4.7 k, 5%, 0.1 W, AEC-Q200 Grade 0, 0603", Manufacturer=Vishay-Dale, Power_W=100mW, Supplier Part Number 1=541-4.7KGCT-ND, TempCo="200 ppm/C", Tolerance_%=5%, Value2=0.1W, Value_Code=4k70, ValueDisplayed=4.7k, AEC Category=Q200, AEC Grade=0, AEC Qualified=Y, ComponentLink1Description="Datasheet link", ComponentLink1URL=http://www.vishay.com/docs/20035/dcrcwe3.pdf, CompType=Resistor, EIA_Code=E24, MountType=SMT, PackageReference=0603, PartNumber=CRCW06034K70JNEA, Res_ohm=4.7k, RoHS=E, SizeArea_mm2=1.28, SizeX_mm=1.6, SizeY_mm=0.8, SizeZ_mm=1, Supplier 1=Digi-Key, Supplier 2=Newark, Supplier 3=Mouser, Supplier Part Number 2=59M6811, Supplier Part Number 3=71-CRCW0603J-4.7K-E3, Technology="Thick Film", Value1=5%, VDC_V=75V
R21: library part CMP-0021990-4, "RES, 100 k, 1%, 0.1 W, AEC-Q200 Grade 0, 0603", Manufacturer=Vishay-Dale, Power_W=100mW, Supplier Part Number 1=541-100KHCT-ND, TempCo="100 ppm/C", Tolerance_%=1%, Value2=0.1W, Value_Code=100k, AEC Category=Q200, AEC Grade=0, AEC Qualified=Y, ComponentLink1Description="Datasheet link", ComponentLink1URL=http://www.vishay.com/docs/20035/dcrcwe3.pdf, CompType=Resistor, EIA_Code=E96, MountType=SMT, PackageReference=0603, PartNumber=CRCW0603100KFKEA, Res_ohm=100k, RoHS=E, SizeArea_mm2=1.28, SizeX_mm=1.6, SizeY_mm=0.8, SizeZ_mm=1, Supplier 1=Digi-Key, Supplier 2=Newark, Supplier 3=Mouser, Supplier Part Number 2=42K3668, Supplier Part Number 3=71-CRCW0603-100K-E3, Technology="Thick Film", Value1=1%, ValueDisplayed=100k, VDC_V=75V
U1: library part CMP-0067206-3, "Tiny Low Input Voltage Boost Converter, DCK0006A (SOT-SC70-6)", Alternate Manufacturer="Texas Instruments", Alternate PartNumber=TPS61222DCKT, AEC Category=Q200, AEC Qualified=N, ComponentLink1Description="Datasheet Link", ComponentLink1URL=http://www.ti.com/lit/ds/symlink/tps61222.pdf, ComponentLink2Description="Product Folder", ComponentLink2URL=http://www.ti.com/product/tps61222, ComponentLink3Description="Online Datasheet", ComponentLink3URL=http://www.ti.com/product/tps61222/datasheet, CompType=IC, Manufacturer="Texas Instruments", MountType=SMT, PackageDescription=SOT-SC70-6, PackageReference=DCK0006A, PartNumber=TPS61222DCKR, RoHS=Y, SizeArea_mm2=4.2, SizeAreaWB_mm2=9.3, SizeX_mm=2.1, SizeY_mm=2.0, SizeZ_mm=1.1
ZZ2 ZZ5 ZZ6: library part CMP-0077236-1, ClassName=AssemblyNote, CompType=AssemblyNote, Key=AssemblyNote, LatestRevisionDate=2017-08-10, Publisher="Texas Instruments"
ZZ3: library part CMP-0077237-1, ClassName=AssemblyNote, CompType=AssemblyNote, Key=AssemblyNote, LatestRevisionDate=2017-08-10, Publisher="Texas Instruments"
ZZ4: library part CMP-0077238-1, ClassName=AssemblyNote, CompType=AssemblyNote, Key=AssemblyNote, LatestRevisionDate=2017-08-10, Publisher="Texas Instruments"

## Via types
v1: diameter 28, hole 12, Top Layer to Bottom Layer, 118 vias

## Nets (pads, with @x,y where several pads share a name; then routed paths per layer and width w, separated by ;. In a path a pad name is that pad's centre, name@x,y a point inside that pad or via, vN(x,y) a via of type N, cw(c..) or ccw(c..) an arc to the next point about the centre after c; other vN are vias at no path point)
3V3: C7.1 C8.1 J1/J3.1 J6.4 R1.1 R5.2 R21.2 | length 349.6
  Bottom Layer w15: v1(1115,1680) C7.1@1163.5,1680 ; J6.4 1153.94,1689.57 C7.1@1163.5,1680 ; C8.1 1163.5,1627.87 C7.1@1163.5,1680 ; v1(1553.5,1733.5) R21.2
  Bottom Layer w25: v1(565,1370) 595,1400 R5.2 ; R1.1 v1(770,2150)
5V0: J1/J3.21 R4.2 | length 1889.4
  Bottom Layer w25: J1/J3.21 350,2210 300,2260 200,2260 150,2210 150,1190 200,1140 400,1140 590.08,1330.08 R4.2
BP2: J1/J3.2 R2.1 R7.2 | length 1180.8
  Top Layer w10: J1/J3.2 300,2000 380,2000 400,1980 400,1817.01 v1(618.5,1598.5)
  Bottom Layer w10: J1/J3.2 300,2100 698.5,2100 R2.1 ; R7.2 v1(618.5,1598.5)
BP3: J1/J3.3
BP4: J1/J3.4
BP5: J1/J3.5 R8.2 | length 779.9
  Top Layer w10: v1(430,1470) v1(745,1470)
  Bottom Layer w10: J1/J3.5 300,1700 300,1520 320,1500 400,1500 v1(430,1470) ; v1(745,1470) R8.2
BP6: J1/J3.6 R14.2 | length 1014.6
  Top Layer w10: J1/J3.6 300,1600 400,1600 470,1530 v1(1120,1530) v1@1132.99,1530
  Bottom Layer w10: v1(1120,1530) 1199.82,1530 R14.2
BP7: J1/J3.7 J5.1 J6.5 | length 1826.5
  Top Layer w10: J1/J3.7 200,1500 200,1420 220,1400 v1(1284.71,1400) 1284.71,1729.78 v1(1197.24,1817.24)
  Bottom Layer w10: J6.5 v1(1197.24,1817.24) ; J5.1 v1(1284.71,1400)
BP8: J1/J3.8 R16.2 | length 859.2
  Top Layer w10: J1/J3.8 300,1500 v1(990,1500)
  Bottom Layer w10: v1(990,1500) R16.2
BP9: J1/J3.9
BP10: J1/J3.10
BP11: J2/J4.11 R20.2 | length 854.7
  Bottom Layer w10: R20.2 1870,1730 1900,1700 2080,1700 2117.87,1662.13 2117.87,1317.87 J2/J4.11
BP12: J2/J4.12 R17.2 | length 1092.9
  Top Layer w10: v1(1730,1570) 1900,1400 2000,1400 J2/J4.12
  Bottom Layer w10: R17.2 1088.5,1570 v1(1730,1570)
BP13: J2/J4.13 R15.2 | length 819.5
  Bottom Layer w10: R15.2 1279.82,1540 1860,1540 1900,1500 2000,1500 J2/J4.13
BP14: J2/J4.14 J6.7 | length 912.7
  Bottom Layer w10: J6.7 1283.86,1646.14 1330,1600 2000,1600 J2/J4.14
BP15: J2/J4.15 J5.2 J6.3 | length 2333.3
  Top Layer w10: v1(1110.63,1850.63) 1749.37,1850.63 1900,1700 2000,1700 J2/J4.15
  Bottom Layer w10: J6.3 v1(1110.63,1850.63) ; J5.2 1219.94,1353.1 1219.94,1323.03 1232.97,1310 1260,1310 1350,1400 2080,1400 2100,1420 2100,1600 J2/J4.15
BP16: J2/J4.16
BP17: J2/J4.17 R18.2 | length 351.6
  Bottom Layer w10: R18.2 1870,1870 1900,1900 2000,1900 J2/J4.17
BP18: J2/J4.18 R19.2 | length 527.5
  Bottom Layer w10: R19.2 2080,1800 2100,1820 2100,1900 J2/J4.18
BP19: J2/J4.19 R13.2 | length 339.2
  Bottom Layer w10: R13.2 2000,2000 J2/J4.19
BP23: J1/J3.23
BP24: J1/J3.24
BP25: J1/J3.25
BP26: J1/J3.26
BP27: J1/J3.27
BP28: J1/J3.28
BP29: J1/J3.29
BP30: J1/J3.30
BP31: J2/J4.31
BP32: J2/J4.32
BP33: J2/J4.33
BP34: J2/J4.34
BP35: J2/J4.35
BP36: J2/J4.36
BP37: J2/J4.37
BP38: J2/J4.38
BP39: J2/J4.39
BP40: J2/J4.40
DCDC_5V0: C3.1 R6.2 U1.2 U1.4 | length 433.5
  Bottom Layer w15: C3.1 615.71,1703.11 U1.4 654.72,1754.72 680.31,1780.31 U1.2
  Bottom Layer w25: R6.2 570,1518.5 570,1631.81 C3.1
EXT_MODE: J5.8 R10.1 R11.2 | length 429
  Bottom Layer w10: R11.2 R10.1 888.5,1193.5 915,1220 915,1275 940,1300 1080,1300 1100.93,1320.93 J5.8
GND: C1.2 C2.2 C3.2 C4.2 C5.2 C6.2 C7.2 C8.2 J1/J3.22 J2/J4.20 J5.9 J5.10 J6.6 J6.9 J6.S1 J6.S2 J6.S3 J6.S4 R11.1 R12.2 U1.3 | length 853.8
  Bottom Layer w10: C2.2 540,1723 v1(559,1704) ; v1(590,1240) 596.38,1240 C4.2 ; C3.2 v1@769.69,1690.31 ; U1.3 710.2,1748.82 C1.2 v1(770,1690) ; v1(741.5,1256.5) R11.1 ; v1(816.38,1371.38) C5.2 ; v1(1030.99,1354.01) J5.10 ; C6.2 1061.56,1395.18 J5.10 ; J5.9 J5.10 ; C8.2 1231.5,1632.87 C7.2 ; v1(1255,1640) 1255,1656.5 C7.2 ; v1(1255,1815) 1240.55,1800.55 J6.6 1240.55,1689.06 C7.2 ; v1(1398.03,2123.03) J6.9 ; R12.2 v1(1731.5,2118.5)
  other v1: 50,1050 560,1050 1150,1050 1700,1050 2125,1070 290,1095 695,1125 475,1150 915,1170 1505,1200 1785,1200 1060,1225 1240,1225 2110,1225 420,1230 1140,1285 300,1300 1385,1315 920,1325 525,1350 1545,1355 1705,1355 1865,1355 415,1360 50,1375 2250,1375 745,1430 1235,1430 1325,1430 410,1435 560,1435 1820,1435 920,1440 1435,1440 1505,1440 1645,1440 1865,1485 1060,1500 1435,1500 1505,1500 1645,1500 1346,1501 510,1565 935,1570 815,1590 220,1600 415,1635 1435,1635 1505,1635 515,1650 1880,1650 1620,1660 1750,1660 1335,1675 50,1700 220,1700 2250,1700 985,1710 1435,1715 1505,1715 415,1750 2125,1750 220,1800 1415,1800 1340,1815 440,1835 840,1835 1040,1835 1245,1895 220,1900 1500,1910 489.35,1982.87 2125,1990 220,2000 840,2000 1040,2000 1445,2015 1610,2015 50,2025 2250,2025 1245,2035 1860,2050 650,2160 840,2180 1040,2180 420,2185 1245,2195 1560,2195 1770,2320 2105,2320 50,2350 600,2350 1150,2350
LCD_DISP: C5.1 J5.5 R8.1 R9.1 | length 515.2
  Bottom Layer w10: C5.1 871.5,1417.87 R8.1 ; R9.1 R8.1 ; J5.5 1159.98,1431.46 1121.44,1470 R8.1
LCD_EXTCOMIN: J5.4 R12.1 R13.1 | length 1151.9
  Top Layer w10: v1(1470,1370) v1(1470,1800)
  Bottom Layer w10: J5.4 1179.67,1320.33 1210,1290 1280,1290 1360,1370 v1(1470,1370) ; v1(1470,1800) 1470,1801.5 R13.1 R12.1
LCD_SPI_CS: J5.3 R14.1 R15.1 | length 185.3
  Bottom Layer w10: J5.3 1199.35,1466.54 R14.1 R15.1
LCD_VCC: C4.1 C6.1 J5.6 J5.7 R4.1 R5.1 R6.1 R7.1 R9.2 R10.2 | length 1063.2
  Bottom Layer w10: R7.1 R9.2
  Bottom Layer w25: C4.1 673.62,1322.2 R4.1 ; R7.1 R6.1 R4.1 ; R10.2 860,1300 829.92,1330.08 ; 1130,1345 1130,1410 1130,1412.75 1098.12,1444.63 985,1444.63 870.45,1330.08 829.92,1330.08 ; R4.1 829.92,1330.08
NetC1_1: C1.1 L1.1 R1.2 R2.2 R3.1 U1.1 | length 579.1
  Bottom Layer w10: L1.1@700,1921.26 L1.1 704.29,1916.97 U1.1 764.09,1805.91 C1.1
  Bottom Layer w25: R3.1 R3.1@540,1970
  Bottom Layer w30: R3.1@540,1970 608.5,2038.5 R2.2 ; L1.1@700,1921.26 R2.2 ; R1.2 R2.2
NetC2_1: C2.1 R3.2 U1.6 | length 155.2
  Bottom Layer w10: C2.1 C2.1@545.91,1805.91
  Bottom Layer w15: C2.1@545.91,1805.91 U1.6
  Bottom Layer w25: C2.1 R3.2
NetJ6_1: J6.1
NetJ6_8: J6.8
NetL1_2: L1.2 U1.5 | length 189.7
  Bottom Layer w10: U1.5 640.31,1780.31 660,1800 660,1879.37 L1.2
SD_DETECT: J6.10 R18.1 R19.1 R20.1 R21.1 | length 465.1
  Bottom Layer w10: J6.10 1468.98,1748.98 1516.5,1796.5 R21.1 1603.5,1800 R19.1 ; R20.1 R19.1 ; R18.1 R19.1
SD_SPI_CS: J6.2 R16.1 R17.1 | length 164.5
  Bottom Layer w10: R16.1 R17.1 1067.32,1668.82 J6.2
pads on no net: FID1.1 FID2.1 FID3.1 J5.M1 J5.M2

## Polygon pours and split planes (outlines as drawn)
NetC1_1 on Bottom Layer "DCDC-VIN" (solid, remove dead copper, pour order 2): 790,1791 790,2059 608,2059 585,2036 585,1995 675,1995 675,1791
DCDC_5V0 on Bottom Layer "DCDC-VOUT" (solid, remove dead copper, pour order 12): 592,1768 592,1689 571,1668 571,1641 660,1641 660,1738 687,1768 672,1792 649,1768
NetL1_2 on Bottom Layer "DCDC-L" (solid, remove dead copper, pour order 10): 595,1985 595,1765 675,1765 675,1985
GND on Bottom Layer "GND-BOT" (solid, remove dead copper, pour order 14): 0,2400 2300,2400 2300,1000 0,1000
3V3 on VCC Layer "3V3-VCC" (solid, remove dead copper, pour order 16): 0,2400 2300,2400 2300,1000 0,1000
GND on GND Layer "GND-GND" (solid, remove dead copper, pour order 18): 0,2400 2300,2400 2300,1000 0,1000
GND on Top Layer "GND-TOP" (solid, remove dead copper, pour order 20): 0,2400 2300,2400 2300,1000 0,1000

## Keep-outs
Keep-Out Layer:
  text ".Layer_Name" at 577,-858.49 h60

## Other copper
Top Layer:
  text ".Layer_Name" at 577,-858.49 h60
VCC Layer:
  text ".Layer_Name" at 577,-858.49 h60
GND Layer:
  text ".Layer_Name" at 577,-858.49 h60
Bottom Layer:
  text ".Layer_Name" at 577,-858.49 h60

## Silkscreen, mask and mechanical layers (free items; w line width, h text height)
Top Overlay:
  lines w7: 620,1105 1680,1105 1680,2310 620,2310 620,1105
  text "BOOSTXL-SHARP128" at 1660,2340 h40
  text "PCB Rev .PCB_Rev" at 2000,2295 h30
  text "LCD_PWR" at 25,2040 h22
  text "EXTCOMIN" at 2115,2040 h22
  text "SD_DET*" at 2115,1940 h22
  text "SD_DET" at 2115,1840 h22
  text "LCD_DISP" at 25,1740 h22
  text "LCD_CS" at 25,1640 h22
  text "SPI_MOSI" at 2115,1640 h22
  text "SPI_CLK" at 25,1540 h22
  text "SPI_MISO" at 2115,1540 h22
  text "SD_CS" at 25,1440 h22
  text "LCD_CS*" at 2115,1440 h22
  text "SD_CS*" at 2115,1340 h22
  text "SD_DET*" at 2115,1240 h22
  text "'.PRJ_Number'.PCB_Rev" at 2060,1020 h30
  text ".Layer_Name" at 577,-858.49 h60
Bottom Overlay:
  drawing of 8142 lines, arcs and shapes, not listed
  text "J3/J1" at 390,2221 h40
  text "LCD_PWR" at 180,2040 h22
  text "EXTCOMIN" at 2280,2040 h22
  text "SD_DET*" at 2280,1940 h22
  text "SD_DET" at 2280,1840 h22
  text "LCD_DISP" at 180,1740 h22
  text "LCD_CS" at 180,1640 h22
  text "SPI_MOSI" at 2280,1640 h22
  text "SPI_CLK" at 180,1540 h22
  text "SPI_MISO" at 2280,1540 h22
  text "SD_CS" at 180,1440 h22
  text "LCD_CS*" at 2280,1440 h22
  text "SD_CS*" at 2280,1340 h22
  text "SD_DET*" at 2280,1240 h22
  text ".Layer_Name" at 577,-858.49 h60
Top Paste:
  text ".Layer_Name" at 577,-858.49 h60
Bottom Paste:
  text ".Layer_Name" at 577,-858.49 h60
Top Solder:
  text ".Layer_Name" at 577,-858.49 h60
  text ".Layer_Name" at 577,-858.49 h60
Bottom Solder:
  text ".Layer_Name" at 577,-858.49 h60
Drill Guide:
  text ".Layer_Name" at 577,-858.49 h60
M1 Board Outline:
  the board outline again, w10
  text ".Layer_Name" at 577,-858.49 h60
M2 Board Dimensions:
  rectangle: 125,-400 500,-275
  rectangle: 0,-275 125,-150
  lines w7: 0,-275 1000,-275 ; 125,-400 125,-150 ; 250,-400 250,-150 ; 500,-400 500,-150 ; 750,-400 750,-150 ; 0,-400 0,-150 1000,-150 1000,-400 0,-400
  text ".Layer_Name" at 577,-858.49 h60
M3 3D STEP Top:
  text ".Layer_Name" at 577,-858.49 h60
M4 3D STEP Bottom:
  text ".Layer_Name" at 577,-858.49 h60
M5 Assembly Top:
  lines w10: -292,-930.17 6308,-930.17 ; -292,-726.83 6310,-726.83 ; -292,-523.5 -292,-1133.5 3713,-1133.5 6310,-1133.5 6310,-523.5 -291.5,-523.5 -291.5,-1133.5 1284,-1133.5 ; 2173,-1133.5 2173,-523.5 ; 3440,-726.83 3440,-523.5 ; 4280,-726.83 4280,-523.5 ; 4902,-1140 4902,-937.17
  text "COMPONENTS MARKED 'DNP' SHOULD NOT BE POPULATED." at 1153.5,-318.5 h60
  text "ASSEMBLY VARIANT:" at 1153,-434 h60
  text ".VariantName" at 2189,-434 h60
  text "PCB VIEWED FROM TOP SIDE" at -228.5,-655.67 h60
  text "BOARD #:" at 2248,-655.67 h60
  text ".PRJ_Number" at 2793.5,-655.67 h60
  text "REV:" at 3638,-655.67 h60
  text ".PCB_Rev" at 3929.5,-655.67 h60
  text "SVN REV:" at 4476,-655.67 h60
  text ".VersionControl_RevNumber" at 4982,-655.67 h60
  text "TID #:" at 2248,-859 h60
  text ".TID" at 2793.5,-859 h60
  text "PLOT NAME =" at -228.5,-1064.34 h60
  text ".plot_File_Name" at 577,-1064.34 h60
  text "GENERATED    :" at 2250,-1064.34 h60
  text ".Print_Date" at 3119.5,-1064.34 h60
  text ".Print_Time" at 3848.5,-1064.34 h60
  text "TEXAS INSTRUMENTS" at 5113,-1064.34 h60
M6 Assembly Bottom:
  lines w10: -292.5,-727.33 6309.5,-727.33 ; -290.5,-930.67 6309.5,-930.67 ; 1115.5,-1140.5 1115.5,-937.67 ; 1737.5,-727.33 1737.5,-524 ; 2577.5,-727.33 2577.5,-524 ; 3844.5,-1134 3844.5,-524 ; 4733.5,-1134 6309,-1134 6309,-524 -292.5,-524 -292.5,-1134 2304.5,-1134 6309.5,-1134 6309.5,-524
  text "COMPONENTS MARKED 'DNP' SHOULD NOT BE POPULATED." at 6102,-318 h60
  text ".VariantName" at 5058,-434 h60
  text "ASSEMBLY VARIANT:" at 6097,-434 h60
  text ".VersionControl_RevNumber" at 1035.5,-656.17 h60
  text "SVN REV:" at 1541.5,-656.17 h60
  text ".PCB_Rev" at 2088,-656.17 h60
  text "REV:" at 2379.5,-656.17 h60
  text ".PRJ_Number" at 3224,-656.17 h60
  text "BOARD #:" at 3769.5,-656.17 h60
  text "PCB VIEWED FROM BOTTOM SIDE" at 6246,-656.17 h60
  text ".TID" at 3224,-859.5 h60
  text "TID #:" at 3769.5,-859.5 h60
  text "TEXAS INSTRUMENTS" at 904.5,-1064.84 h60
  text ".Print_Time" at 2169,-1064.84 h60
  text ".Print_Date" at 2898,-1064.84 h60
  text "GENERATED    :" at 3767.5,-1064.84 h60
  text ".plot_File_Name" at 5440.5,-1064.84 h60
  text "PLOT NAME =" at 6246,-1064.84 h60
M9 Title Sheet:
  drawing of 57 lines, arcs and shapes, not listed
  text "1" at 739.84,8036.5 h70
  text "2" at 3235.5,8036.5 h70
  text "3" at 5724.84,8036.5 h70
  text "4" at 8231.51,8036.5 h70
  text "5" at 10730.5,8036.5 h70
  text "6" at 13235.5,8036.5 h70
  text "A" at -416.5,6893.5 h70
  text "A" at 14383.5,6893.5 h70
  text "B" at -416.5,4513.5 h70
  text "B" at 14383.5,4513.5 h70
  text "C" at -416.5,2138.5 h70
  text "C" at 14383.5,2138.5 h70
  text "PROJECT TITLE:" at 11343.5,277.5 h45
  text ".PRJ_Title" at 11393.5,144.17 h70
  text "DESIGNED FOR:" at 11343.5,-23.5 h45
  text ".PRJ_Customer" at 11393.5,-163.5 h70
  text "D" at -416.5,-231.5 h70
  text "D" at 14383.5,-231.5 h70
  text "FILE NAME:" at 11343.5,-323.5 h45
  text ".PCB_File_Name_No_Path" at 11393.5,-443.5 h70
  text "Texas Instruments (TI) and/or its licensors do not warrant the accuracy or completeness of this specification" at 6374,-605.34 h45
  text "ENGINEER:" at 11343.5,-613.5 h45
  text "LAYOUT BY:" at 12848.5,-613.5 h45
  text "or any information contained therein. TI and/or its licensors do not warrant that this design will meet" at 6329.01,-718 h45
  text ".PRJ_Engineer" at 11393.5,-768.49 h70
  text ".PCB_Layout" at 12899,-768.49 h70
  text "the specifications, will be suitable for your application or fit for any particular purpose, or will operate in" at 6329.01,-830.67 h45
  text ".Layer_Name" at 577,-858.49 h60
  text "ALTIUM DESIGNER VERSION:" at 12848.5,-923.5 h45
  text "an implementation. TI and/or its licensors do not warrant that the design is production worthy. You should" at 6329.01,-943.33 h45
  text "completely validate and test your design implementation to confirm the system functionality for your application." at 6374,-1056 h45
  text ".print_Scale" at 11393.5,-1056.83 h70
  text ".Application_BuildNumber" at 12899,-1056.83 h70
  text "1" at 739.84,-1263.5 h70
  text "2" at 3235.5,-1263.5 h70
  text "3" at 5724.84,-1263.5 h70
  text "4" at 8231.51,-1263.5 h70
  text "5" at 10730.5,-1263.5 h70
  text "6" at 13235.5,-1263.5 h70
M10 Fab Notes:
  drawing of 189 lines, arcs and shapes, not listed
  text "DESIGN INFORMATION" at 12382.02,6356.17 h60
  text "MIN. TRACK WIDTH:" at 11737.46,6224.05 h60
  text "10" at 12833.7,6224.05 h60
  text "MIL" at 12988.46,6224.05 h60
  text "MIN. CLEARANCE:" at 11737.46,6099.92 h60
  text "0.2" at 12773.7,6099.93 h60
  text "mm" at 12988.46,6099.92 h60
  text "MIN. VIA PAD SIZE:" at 11737.46,5975.8 h60
  text "28" at 12803.71,5975.8 h60
  text "MIL" at 12988.46,5975.8 h60
  text "0.05mm (2MIL)" at 12432.46,5845.9 h60
  text "MINIMUM ANNULAR RING" at 11408.23,5837.67 h60
  text "EXTERNAL" at 13140.46,5837.67 h60
  text "PER" at 11608.23,5727.55 h60
  text "IPC-D-275 CLASS 2 LEVEL C" at 11828.23,5727.54 h60
  text "MIL, HOLES" at 13316.46,5627.07 h60
  text "+/-" at 12924,5618.48 h60
  text "+/-" at 13778,5618.48 h60
  text "REGISTRATION TOLERANCES:" at 11408.23,5617.42 h60
  text "METAL" at 12608,5617.42 h60
  text "5" at 13184.2,5617.42 h60
  text "3" at 14017.2,5617.42 h60
  text "MIL" at 14133.46,5617.42 h60
  text "HOLE SIZE TOLERANCE (UNLESS OTHERWISE SPECIFIED):" at 11408.23,5519.1 h60
  text "+/-" at 13778,5516.23 h60
  text "3" at 14017.2,5515.17 h60
  text "MIL" at 14133.46,5515.17 h60
  text "MATERIAL:" at 11333.46,5377.52 h60
  text "FR-4 High Tg" at 12319.9,5249 h60
  text "X" at 12175.46,5241.01 h60
  text "FR-408" at 11754.46,5236.49 h60
  text "OTHER" at 13242.46,5236.49 h60
  text "62 MIL (1.6mm) +/-10%" at 12074.56,5093.46 h60
  text "X" at 11954.46,5091.01 h60
  text "THICKNESS:" at 11408.23,5085.24 h60
  text "OTHER" at 13359.46,5085.24 h60
  text "TOLERANCE:" at 11408.23,4946.92 h60
  text "X" at 12256.46,4946.92 h60
  text "ANSI IPC-6012 TYPE 3 CLASS 2" at 12434.48,4946.92 h60
  text "OTHER +/-" at 12434.46,4802.73 h60
  text "BOW & TWIST:" at 11408.23,4657.54 h60
  text "X" at 12256.46,4657.54 h60
  text "ANSI IPC-6012 TYPE 3 CLASS 2" at 12434.48,4657.54 h60
  text "OTHER +/-" at 12434.46,4510.85 h60
  text "DRILLING:" at 11333.46,4380.23 h60
  text "NC_DRILL FILES" at 13094.46,4275.04 h60
  text "REFERENCE:" at 11408.23,4271.1 h60
  text "X" at 12065.46,4271.01 h60
  text "AS SHOWN" at 12243.46,4271.1 h60
  text "X" at 12966.46,4271.1 h60
  text "OTHER" at 13392.46,4128.85 h60
  text "PTH COPPER THICKNESS:" at 11407.91,4125.32 h60
  text "X" at 12547.14,4125.32 h60
  text "20-30 um" at 12675.14,4125.32 h60
  text "BOARD FINISH:" at 11333.46,3977.73 h60
  text "SILKSCREEN:" at 11488.68,3867.6 h60
  text "X" at 12446.46,3867.6 h60
  text "TOP" at 12563.46,3867.6 h60
  text "X" at 12956.46,3867.6 h60
  text "BOTTOM" at 13074.46,3867.6 h60
  text "SILKSCREEN COLOR:" at 11488.68,3712.41 h60
  text "X" at 12445.46,3712.41 h60
  text "WHITE" at 12563.46,3712.41 h60
  text "OTHER" at 13074.46,3712.41 h60
  text "X" at 13170,3570 h60
  text "GREEN" at 12694.46,3568.96 h60
  text "OTHER" at 13312.46,3568.96 h60
  text "RED" at 13784.46,3568.96 h60
  text "SOLDER RESIST COLOR:" at 11488.68,3562.1 h60
  text "MATTE" at 12694.46,3414.71 h60
  text "X" at 13171.46,3414.71 h60
  text "SEMI-GLOSS" at 13312,3414.07 h60
  text "IMMERSION GOLD (ENIG)" at 12394.46,3241.94 h60
  text "ENEPIG" at 13732,3234.72 h60
  text "SURFACE FINISH:" at 11333.46,3233.72 h60
  text "IMM. TIN/SILVER OR EQUIV" at 11663,3096.4 h60
  text "X" at 11511.46,3093.72 h60
  text "OTHER" at 13094.46,3092.47 h60
  text "ARRAY/PANEL:" at 11333.46,2937.09 h60
  text "CUT AND TRIM PER M1 BOARD OUTLINE" at 12394.46,2928.87 h60
  text "N.C. ROUTE" at 12394.46,2792.9 h60
  text "X" at 13082.46,2792.9 h60
  text "V. SCORE" at 13260.46,2792.9 h60
  text "CERTIFICATION:" at 11333.46,2663.77 h60
  text "MATERIALS AND WORKMANSHIP FOR ALL PCBS" at 12058.46,2663.77 h60
  text "TO MEET OR EXCEED THE REQUIREMENTS OF:" at 12058.46,2569.71 h60
  text "X" at 11695.97,2441.08 h60
  text "ANSI IPC-A-600F CLASS ->" at 11823.96,2441.08 h60
  text "X" at 13471.97,2441.08 h60
  text "2" at 13581.96,2441.08 h60
  text "1" at 13266.96,2439.58 h60
  text "3" at 13935.96,2439.58 h60
  text "X" at 12507.97,2293.39 h60
  text "RoHS" at 12635.96,2293.39 h60
  text "OTHER" at 13280.36,2293.39 h60
  text "PER ORDER" at 13677.42,2293.39 h60
  text "ALL BOARDS MUST MEET OR EXCEED UL94-V0 REQUIREMENTS." at 11361,2139.57 h60
  text "PCB MUST BEAR THE UL94V-0 UL REGISTERED MATERIAL ID NUMBER" at 11361,2023.5 h60
  text "ADDITIONAL REQUIREMENTS:" at 11333.46,1854.08 h60
  text "MICROSECTION:" at 11408.23,1746.95 h60
  text "YES" at 12313.96,1746.95 h60
  text "REQUIRED" at 13175.46,1602.62 h60
  text "BARE BOARD ELEC. TEST:" at 11408.23,1599.76 h60
  text "NONE" at 12713.96,1599.76 h60
  text "X" at 13652.46,1599.76 h60
  text "PER ORDER" at 13767.46,1599.76 h60
  text "XX MIL VIAS REQUIRE NON-CONDUCTIVE FILL AND PLANARIZE" at 11576.38,1394.82 h59
  text "XX MIL VIAS REQUIRE CONDUCTIVE FILL AND PLANARIZE" at 11584.38,1290.84 h60
  text "OUTER XX MIL TRACES REQUIRE 50 OHM SINGLE-ENDED IMPEDANCE" at 11583.39,1127.46 h58
  text "LAYER 2 & 3 (INNER LAYERS) XX MIL WIDE, XX MIL SPACE / TRACES REQUIRE 100 OHM DIFFERENTIAL IMPEDANCE" at 11575.39,891.74 h60
  text ".Layer_Name" at 577,-858.49 h60
M11 Gerber Information:
  lines w10: -292,-930.17 6308,-930.17 ; -292,-726.83 6310,-726.83 ; -292,-523.5 -292,-1133.5 3713,-1133.5 6310,-1133.5 6310,-523.5 -291.5,-523.5 -291.5,-1133.5 1284,-1133.5 ; 2173,-1133.5 2173,-523.5 ; 3440,-726.83 3440,-523.5 ; 4280,-726.83 4280,-523.5 ; 4902,-1140 4902,-937.17
  text "ALL ARTWORK VIEWED FROM TOP SIDE" at -228.5,-655.67 h60
  text "BOARD #:" at 2248,-655.67 h60
  text ".PRJ_Number" at 2793.5,-655.67 h60
  text "REV:" at 3638,-655.67 h60
  text ".PCB_Rev" at 3929.5,-655.67 h60
  text "SVN REV:" at 4476,-655.67 h60
  text ".VersionControl_RevNumber" at 4982,-655.67 h60
  text "LAYER NAME =" at -228.5,-858.49 h60
  text "TID #:" at 2248,-859 h60
  text ".TID" at 2793.5,-859 h60
  text "PLOT NAME =" at -228.5,-1064.34 h60
  text ".plot_File_Name" at 577,-1064.34 h60
  text "GENERATED    :" at 2250,-1064.34 h60
  text ".Print_Date" at 3119.5,-1064.34 h60
  text ".Print_Time" at 3848.5,-1064.34 h60
  text "TEXAS INSTRUMENTS" at 5113,-1064.34 h60
M12 Stackup:
  drawing of 295 lines, arcs and shapes, not listed
  text "Layer" at 4105,6142.5 h60